# Altium PCB PCB2.PcbDoc
Units mm, origin at the board's own origin, x right, y up, seen from the top; angles counter-clockwise.
Board outline 32 x 44.96 mm, 2 copper layers (Top Layer, Bottom Layer); 13 components, 13 nets, 44 pads, 0 vias.
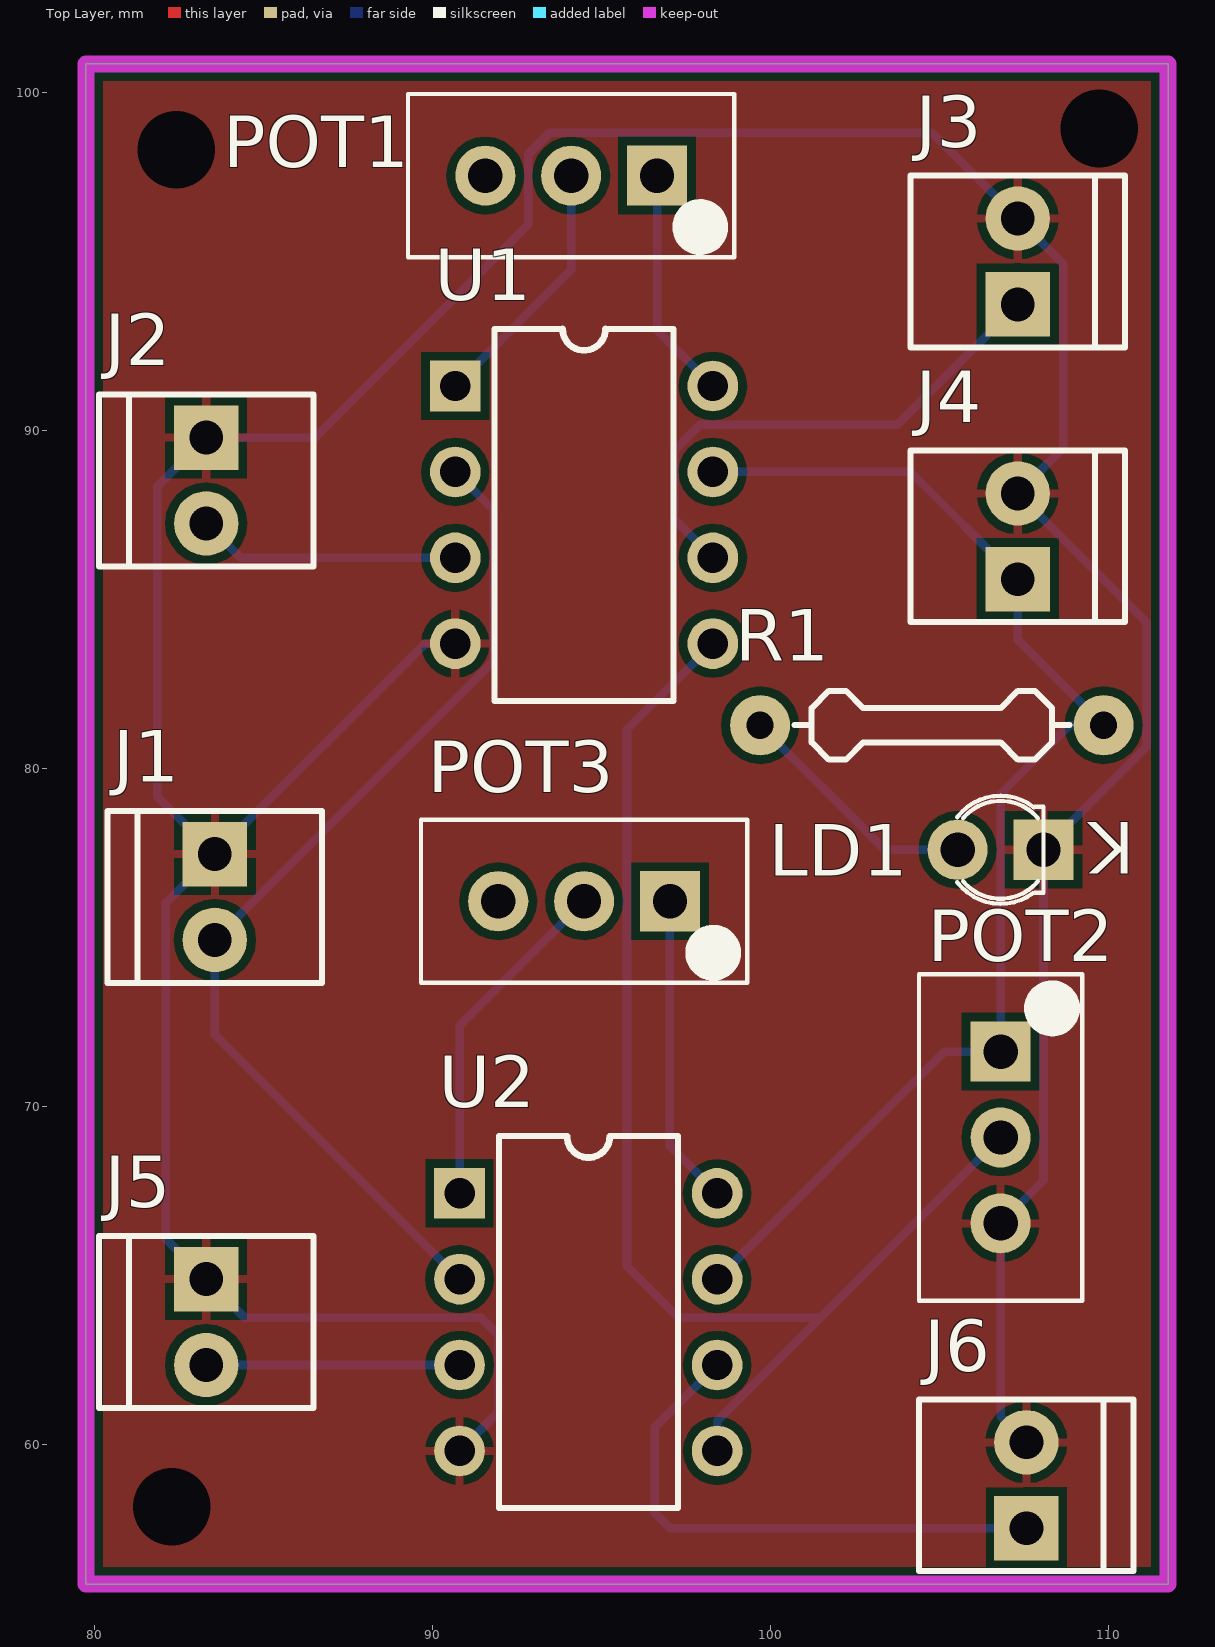
[diagram p0: Top Layer view]
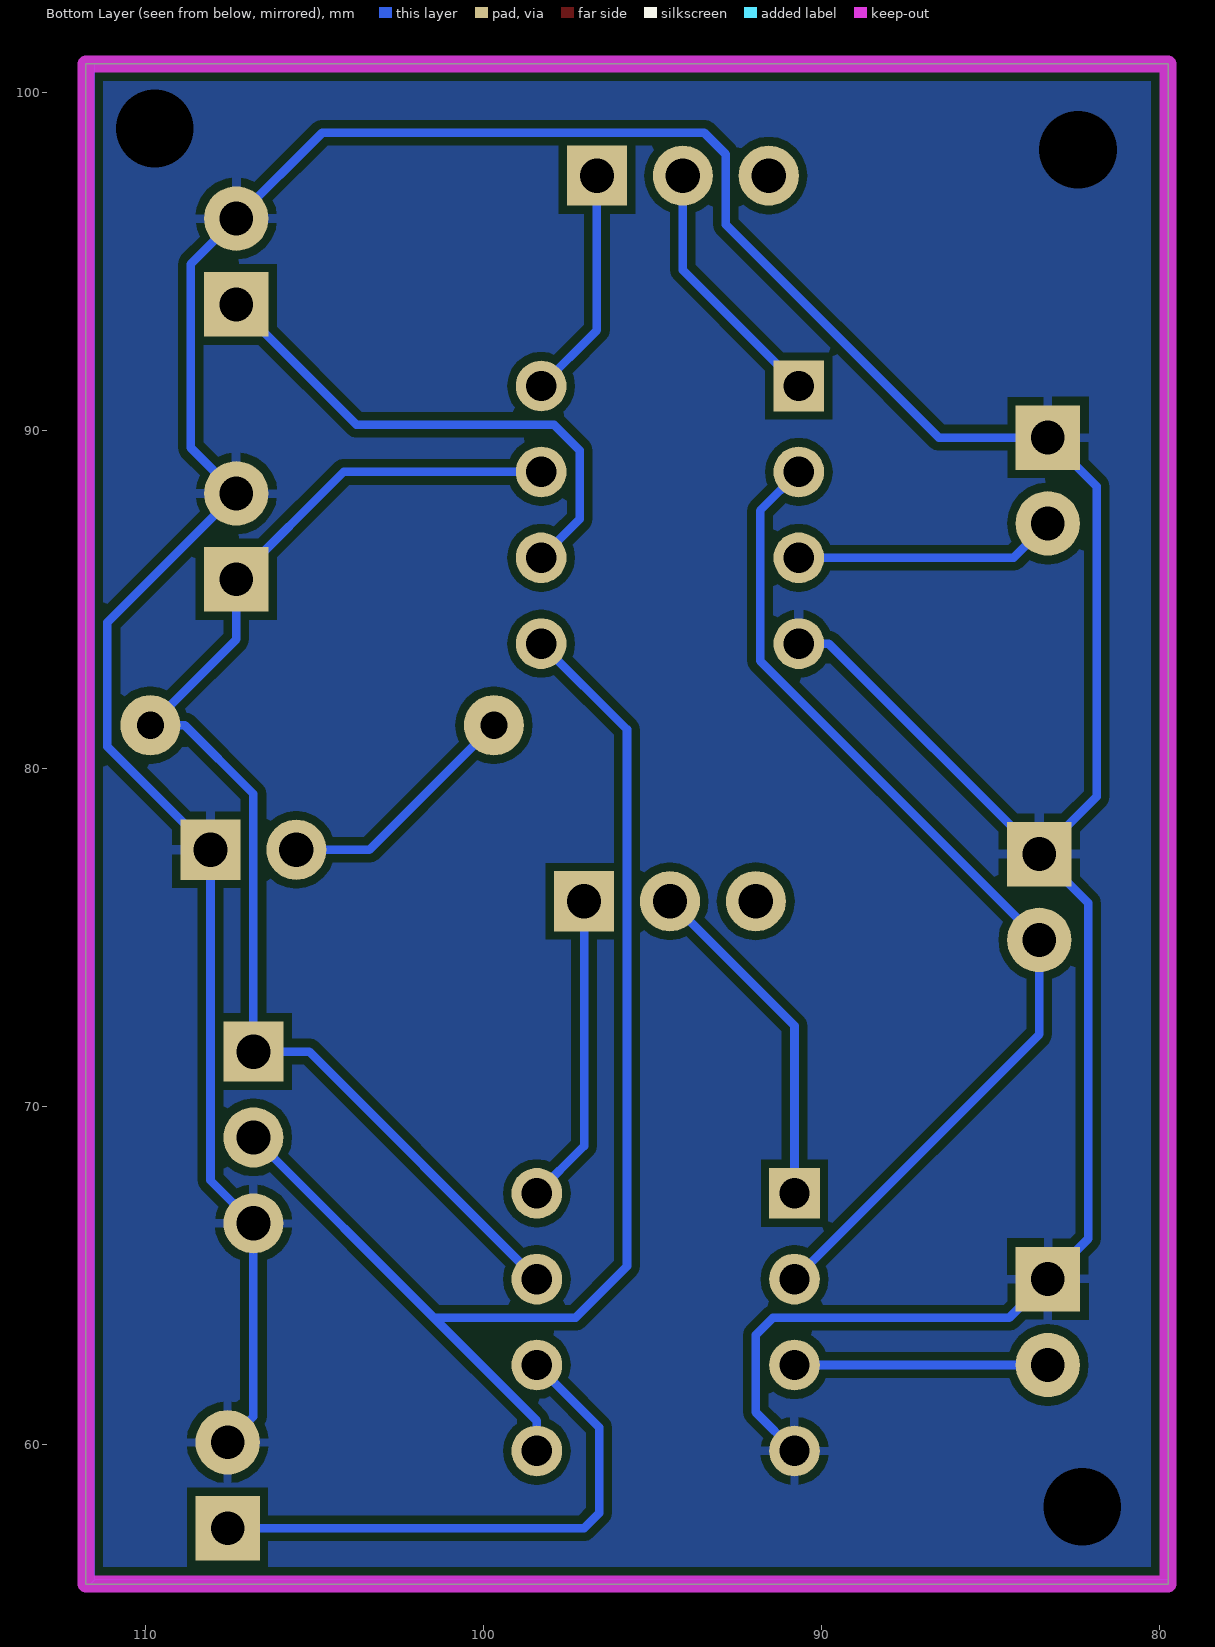
[diagram p1: Bottom Layer view, seen from below]

## Layer stack, top to bottom
Top Solder: solder mask 0.0102, Solder Resist, Dk 3.5
Top Layer: signal copper 0.0356
Dielectric 1: dielectric 0.32, FR-4, Dk 4.8
Bottom Layer: signal copper 0.0356
Bottom Solder: solder mask 0.0102, Solder Resist, Dk 3.5

## Board outline
79.756,55.88 111.76,55.88 111.76,100.838 79.756,100.838

## Design rules (kind name [scope] priority, off if disabled: settings)
Clearance [All] p1: gap=0.254
PolygonConnect [All] p1: connectstyle=Relief reliefconductorwidth=0.254 reliefentries=4 polygonreliefangle="90 Angle" airgapwidth=0.254
RoomDefinition Ampli [InComponentClass('Ampli')] p1 off: confinementstyle=ConfineIn formatcopy=TRUE lockcomponents=FALSE outline 131.318,42.164 131.318,143.764 116.332,143.764 116.332,42.164
RoutingVias [All] p1: holewidth=0.711 width=1.27 viastyle="Through Hole" minholewidth=0.711 minwidth=1.27 maxholewidth=0.711 maxwidth=1.27
SolderMaskExpansion [All] p1: expansion=0.102
Width [All] p1: maxlimit=0.254 minlimit=0.254 preferedwidth=0.254
30 further rules are at their usual default settings.

## Components (designator, comment, footprint, x,y, rotation, side; value= is the part's Value field where it differs from the comment)
J1 "Input" MTA100-2 83.566,77.47 r180 top
J2 "Input" MTA100-2 83.312,89.789 r180 top
J3 "Input" MTA100-2 107.315,93.726 r0 top
J4 "Input" MTA100-2 107.315,85.598 r0 top
J5 "Input" MTA100-2 83.312,64.897 r180 top
J6 "Input" MTA100-2 107.569,57.531 r0 top
LD1 "Power Good" "LED 3mm Vertical" 106.807,77.597 r90 top
POT1 "?????" VR1 94.107,97.536 r180 top
POT2 "?????" VR1 106.807,69.088 r270 top
POT3 "?????" VR1 94.488,76.073 r180 top
R1 "Res 1/4W" "Axial 0.4\" Step" 104.775,81.28 r180 top
U1 "OpAmp Single" DIP8 94.488,87.503 r270 top
U2 "OpAmp Single" DIP8 94.615,63.627 r270 top

## Footprints (in the part's own frame and the unit in brackets; to place one, negate y for a bottom-side part, rotate by r counter-clockwise, add the part's x,y. Pads: shape width x height; smd on the part's side, far side on the other; paste and mask are expansions set on the pad)
"Axial 0.4\" Step" [mil] "Axial 3D Step"
  round 70 hole 31.5: 1(-200,0) 2(200,0)
  silkscreen extent -160,-40 160,40, body extent -212,-45 212,46, height 116
DIP8 [mm] "DIP8"
  rect 1.5x1.5 hole 0.9: 1(-3.81,-3.81)
  round 1.5 hole 0.9: 2(-1.27,-3.81) 3(1.27,-3.81) 4(3.81,-3.81) 5(3.81,3.81) 6(1.27,3.81) 7(-1.27,3.81) 8(-3.81,3.81)
  silkscreen extent -5.5,-2.65 5.5,2.65, body extent -5.59,-4.19 5.59,4.19, height 2.54
"LED 3mm Vertical" [mil] "LED 3mm Vertical"
  round 70 hole 40: 1(0,50)
  rect 70x70 hole 40: 2(0,-50)
  silkscreen extent -63,-50 63,50, body extent -68,-75 69,69, height 242
MTA100-2 [mm] "MTA100-2 M"
  rect 1.905x1.905 hole 1.001: 1(0,0)
  round 1.905 hole 1.001: 2(0,2.54)
  silkscreen extent -3.18,-1.27 3.17,3.81, body extent -3.18,-1.27 3.17,3.81, height 2.54
VR1 [mil] "Trim 10T Vertical"
  rect 70x70 hole 40: 1(-100,0)
  round 70 hole 40: 2(0,0) 3(100,0)
  silkscreen extent -190,-95 190,95, body extent -190,-95 190,95, height 478

## Part data
J1 J2 J3 J4 J5 J6: library part MTA100-2, "MTA Male 0 Degres"
LD1: library part "LED 3mm Vertical", "Through Hole"
POT1 POT2 POT3: library part "Res Pot 10T Vertical"
R1: "Resistor"

## Free pads (board coordinates)
  round 1.524 hole 2.3: 1(82.423,98.298) 2(82.296,58.166) 3(109.728,98.933)

## Nets (pads, with @x,y where several pads share a name; then routed paths per layer and width w, separated by ;. In a path a pad name is that pad's centre, name@x,y a point inside that pad or via, vN(x,y) a via of type N, cw(c..) or ccw(c..) an arc to the next point about the centre after c; other vN are vias at no path point)
GND: J1.1 J2.1 J3.2 J4.2 J5.1 J6.2 LD1.2 pad.1 pad.2 pad.3 POT2.3 U1.4 U2.4 | length 121.2
  Bottom Layer w0.254: U1.4 89.789,83.693 J1.1 ; U2.4 91.948,60.96 91.948,63.246 91.44,63.754 84.455,63.754 J5.1 82.118,66.091 82.118,76.022 J1.1 ; J6.2 106.807,60.833 POT2.3 108.077,67.818 LD1.2 111.125,80.645 111.125,84.328 J4.2 108.661,89.484 108.661,94.92 J3.2 104.775,98.806 93.472,98.806 92.837,98.171 92.837,96.088 86.538,89.789 J2.1 81.864,88.341 81.864,79.172 J1.1
LEDREF: J1.2 U1.2 U2.2 | length 30.8
  Bottom Layer w0.254: U1.2 91.821,87.63 91.821,83.185 J1.2 83.566,72.136 U2.2
NetJ2_2: J2.2 U1.3 | length 7.8
  Bottom Layer w0.254: J2.2 84.328,86.233 U1.3
NetJ3_1: J3.1 U1.6 | length 15.6
  Bottom Layer w0.254: U1.6 97.155,87.376 97.155,89.408 97.917,90.17 103.759,90.17 J3.1
NetJ5_2: J5.2 U2.3 | length 7.5
  Bottom Layer w0.254: J5.2 U2.3
NetJ6_1: J6.1 U2.6 | length 16.3
  Bottom Layer w0.254: U2.6 96.584,60.515 96.584,57.975 97.028,57.531 J6.1
NetLD1_1: LD1.1 R1.2 | length 7.4
  Bottom Layer w0.254: R1.2 103.378,77.597 LD1.1
NetPOT1_1: POT1.1 U1.8 | length 6.9
  Bottom Layer w0.254: POT1.1 96.647,92.964 U1.8
NetPOT1_2: POT1.2 U1.1 | length 7.6
  Bottom Layer w0.254: U1.1 94.107,94.742 POT1.2
NetPOT3_1: POT3.1 U2.8 | length 9.2
  Bottom Layer w0.254: POT3.1 97.028,68.834 U2.8
NetPOT3_2: POT3.2 U2.1 | length 10.2
  Bottom Layer w0.254: U2.1 90.805,72.39 POT3.2
REF: POT2.2 U1.5 U2.5 | length 38.6
  Bottom Layer w0.254: U1.5 95.758,81.153 95.758,65.278 97.282,63.754 101.473,63.754 ; U2.5 98.425,60.706 101.473,63.754 ; POT2.2 101.473,63.754
VCC: J4.1 POT2.1 R1.1 U1.7 U2.7 | length 38.4
  Bottom Layer w0.254: U1.7 104.14,88.773 J4.1 107.315,83.82 R1.1 108.839,81.28 106.807,79.248 POT2.1 105.156,71.628 U2.7
pads on no net: POT1.3 POT3.3

## Polygon pours and split planes (outlines as drawn)
GND on Bottom Layer "Top Layer-No Net" (solid, pour order 6): 79.756,100.838 79.756,55.88 111.633,55.88 111.633,100.711 111.506,100.838
GND on Bottom Layer "Top Layer-No Net" (solid, shelved, pour order 6): 79.756,100.838 79.756,56.007 111.506,56.007 111.633,55.88 111.506,56.007 111.506,100.838
GND on Top Layer "Top Layer-No Net" (solid, pour order 4): 79.756,100.838 79.756,55.88 111.76,55.88 111.506,56.134 111.506,100.838
GND on Top Layer "Top Layer-No Net" (solid, shelved, pour order 8): 79.756,100.838 79.756,55.88 79.883,56.007 111.76,56.007 111.76,100.838

## Keep-outs
Keep-Out Layer:
  the board outline again, w0.5

## Silkscreen, mask and mechanical layers (free items; w line width, h text height)
Mechanical 1:
  text "CLKOUT" at 102.87,98.298 h1.52
  text "CLKIN" at 80.391,91.821 h1.52
  text "ALIM" at 104.902,89.662 h1.52
  text "LEDREF" at 80.391,79.248 h1.52
  text "VREF" at 109.601,73.279 h1.52 r270
  text "MANIN" at 80.264,66.802 h1.52
  text "MANOUT" at 102.362,62.103 h1.52

## Text inside footprints (layer, text, board x,y; h text height)
LD1: Top Overlay "K" at 110.769,78.41 h1.52 r180